# Altium PCB GPSBoard_L30.PcbDoc
Units mm, origin at the board's own origin, x right, y up, seen from the top; angles counter-clockwise.
Board outline 44 x 44 mm, 2 copper layers (Top Layer, Bottom Layer), stack 1.571 mm thick; 29 components, 18 nets, 142 pads, 30 vias.
Unrouted connection lines stored in the file: 12.
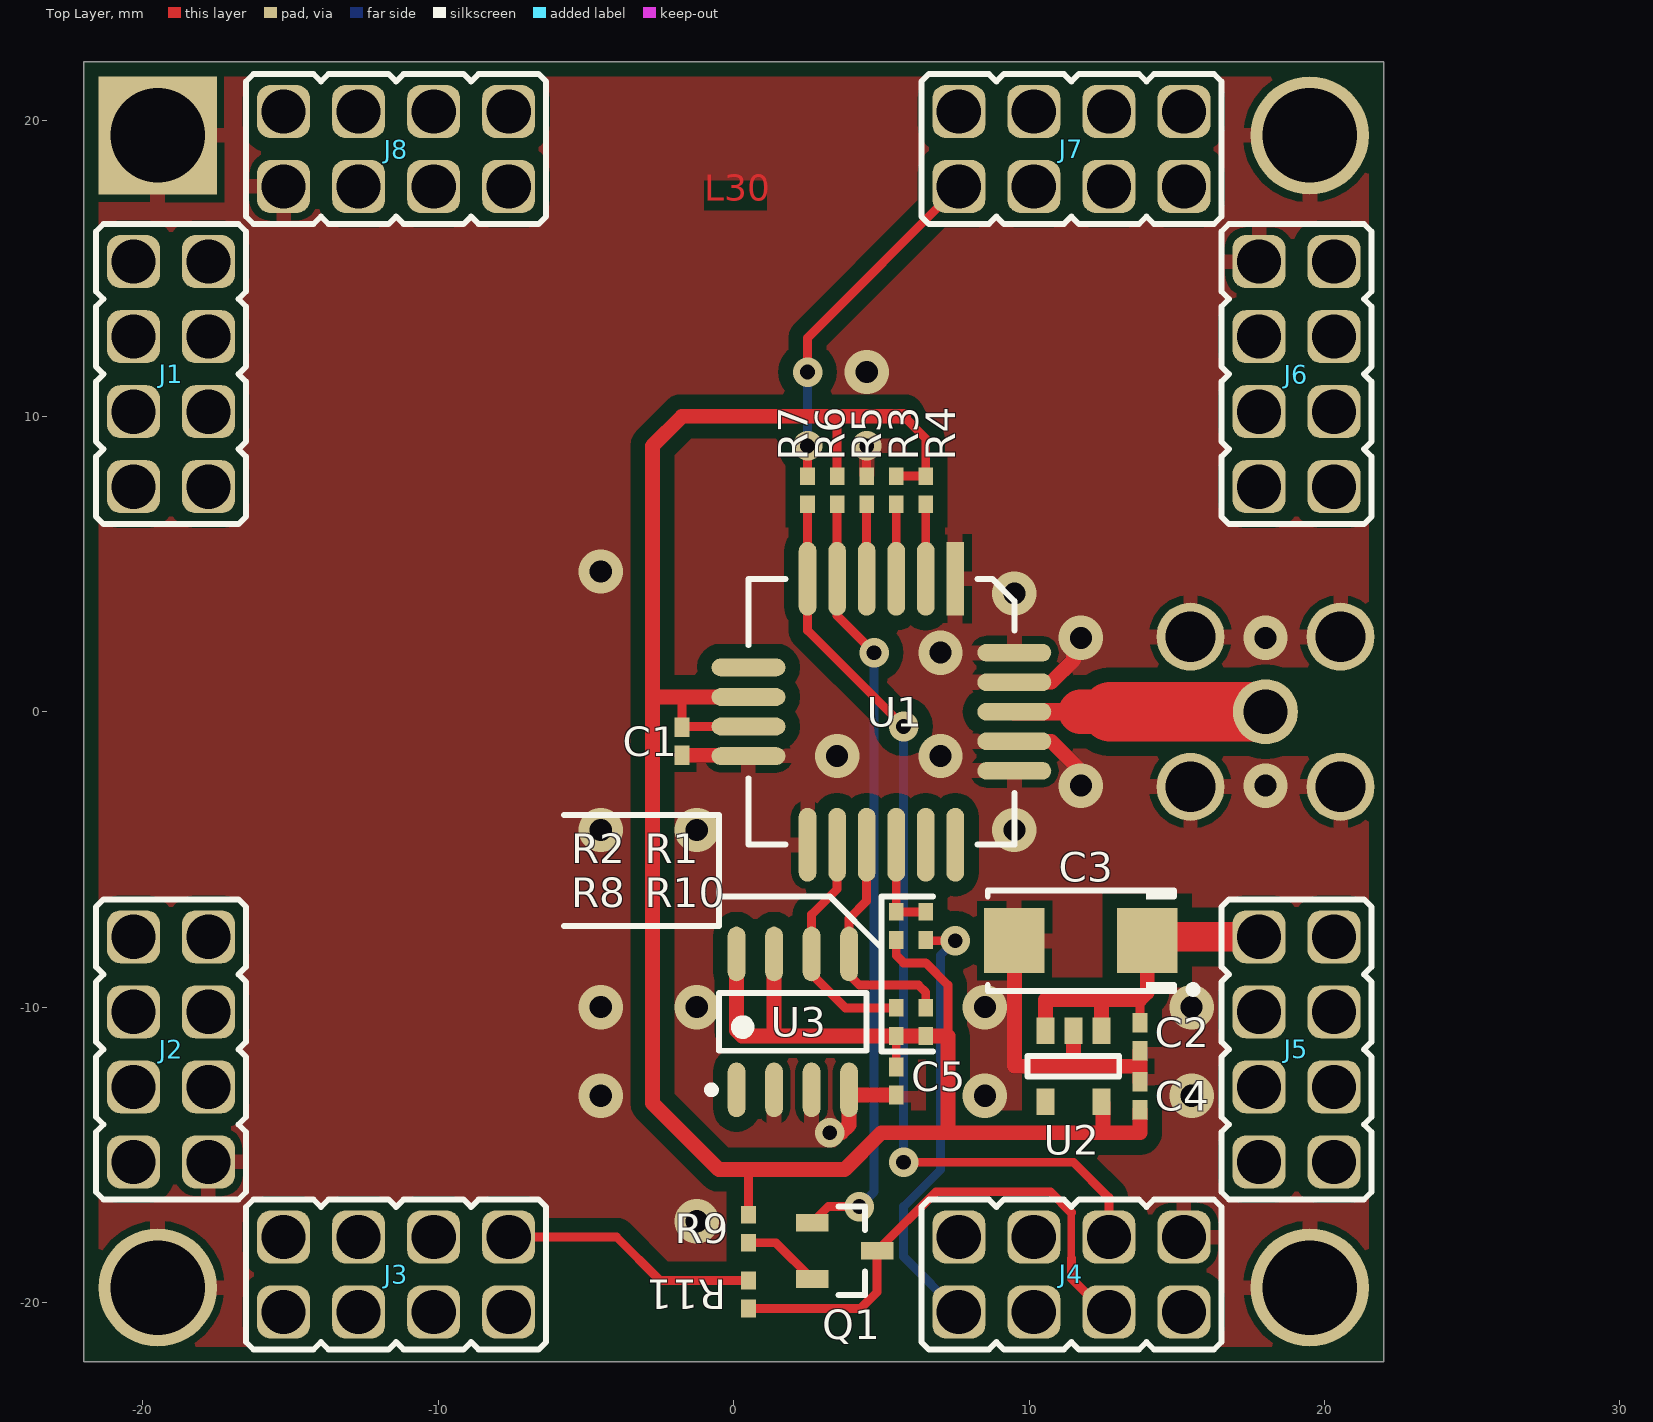
[diagram p0: Top Layer view]
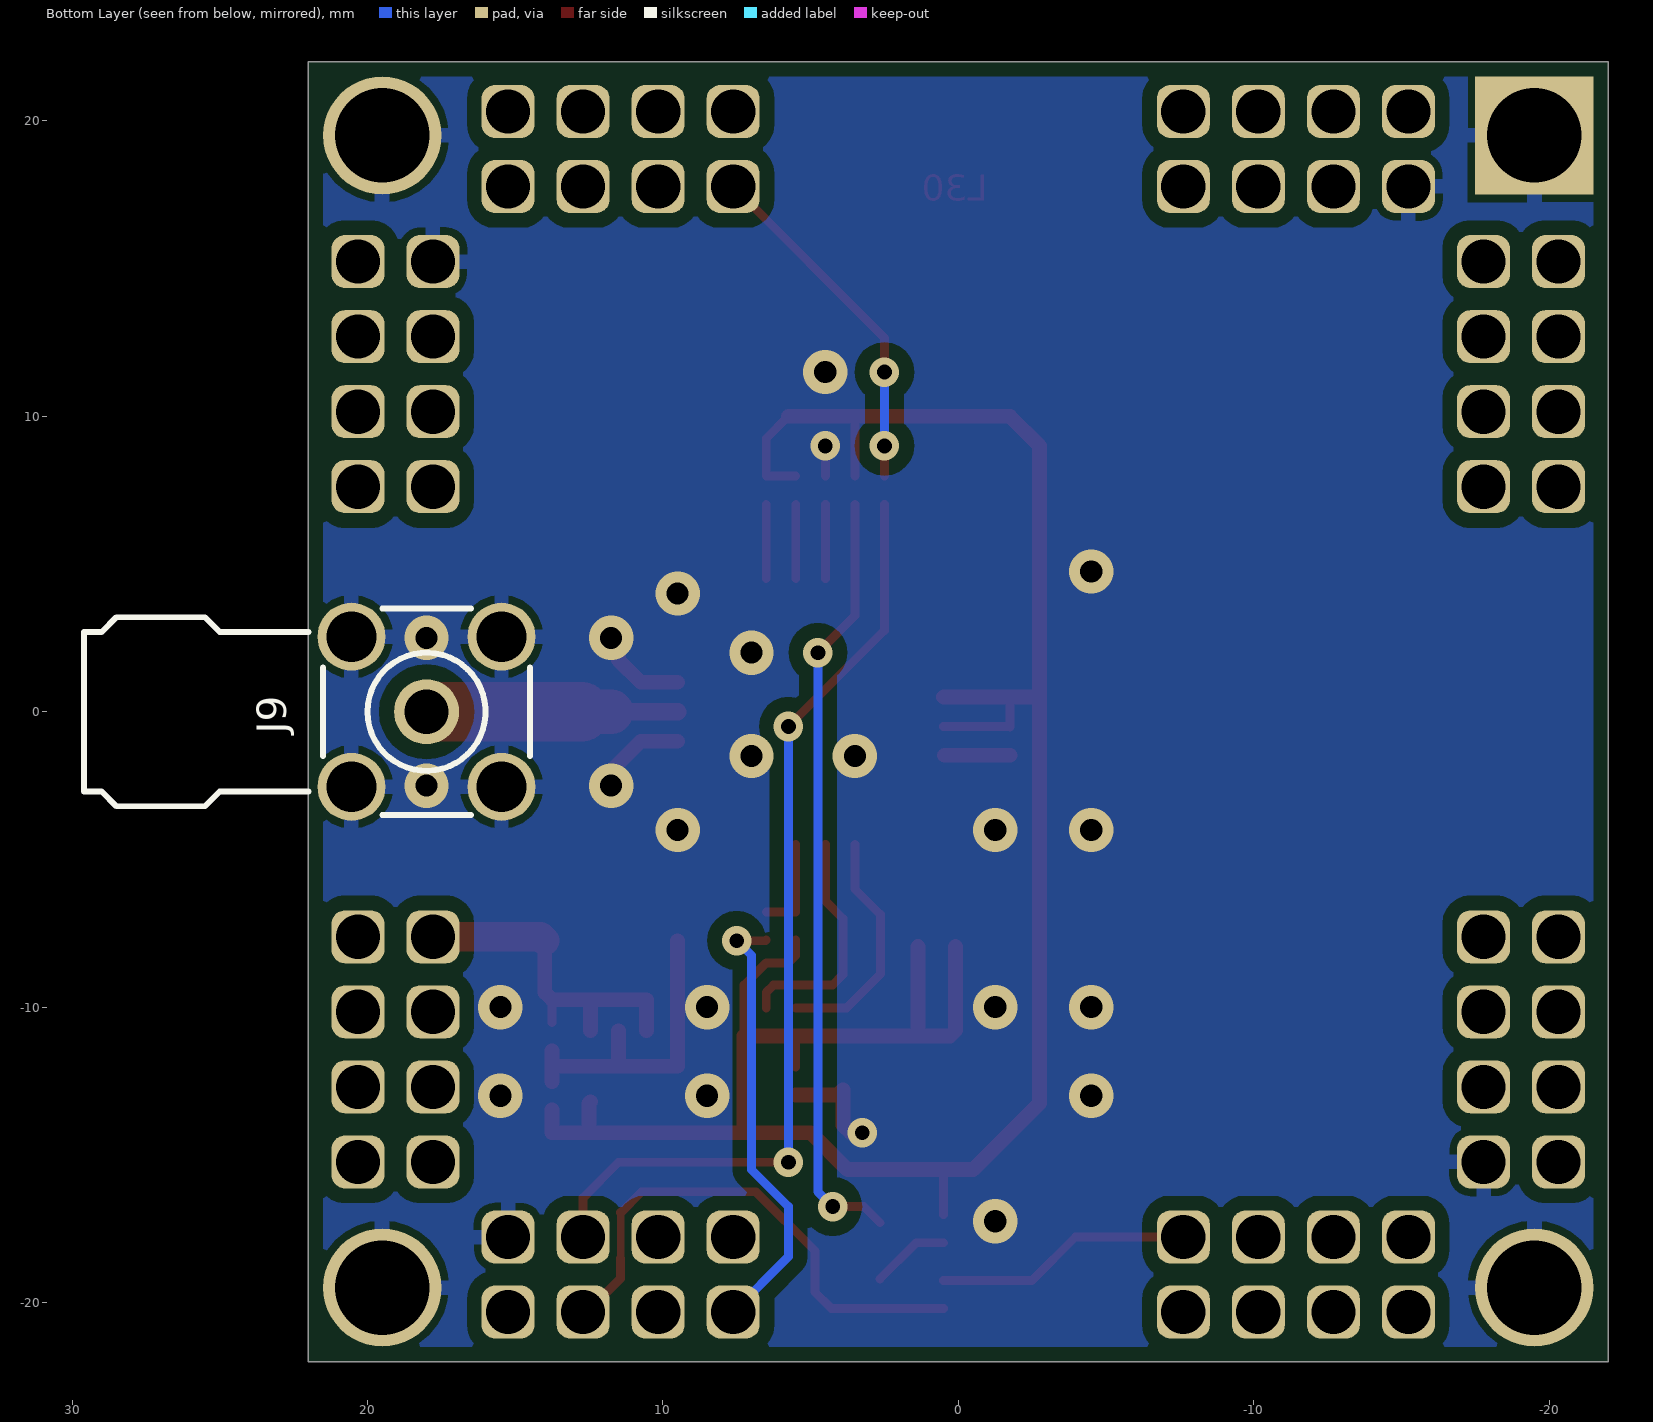
[diagram p1: Bottom Layer view, seen from below]

## Layer stack, top to bottom
Top Solder: solder mask 0.0102, Solder Resist, Dk 3.5
Top Layer: signal copper 0.0356
Dielectric 1: dielectric 1.5, FR-4, Dk 4.8
Bottom Layer: signal copper 0.0356
Bottom Solder: solder mask 0.0102, Solder Resist, Dk 3.5

## Board outline
-22,-22 -22,22 22,22 22,-22

## Design rules (kind name [scope] priority, off if disabled: settings)
Clearance Clearance_Text_Polygon(GND) [InPolygon and InNet('GND') vs IsText] p1: gap=0
Clearance Clearance_Track(GND)_Polygon(GND) [InPolygon and InNet('GND') vs IsTrack and InNet('GND')] p2: gap=0
Clearance Clearance_All_Polygon(GND) [InPolygon and InNet('GND')] p3: gap=0.5
Clearance [All] p4: gap=0.25
HoleSize [All] p1: absolutevalues=TRUE maxlimit=4 minlimit=0.3 maxpercent=80.000 minpercent=20.000
PolygonConnect PolygonConnect_Via(GND) [InNet('GND') vs IsVia] p1: connectstyle=Direct reliefconductorwidth=0.254 reliefentries=4 polygonreliefangle="90 Angle" airgapwidth=0.254
PolygonConnect [All] p2: connectstyle=Relief reliefconductorwidth=0.5 reliefentries=4 polygonreliefangle="90 Angle" airgapwidth=0.254
RoutingVias [All] p1: holewidth=0.5 width=1 viastyle="Through Hole" minholewidth=0.5 minwidth=1 maxholewidth=1.5 maxwidth=2
ShortCircuit ShortCircuit_Text_Polygon(GND) [IsText vs InPolygon and InNet('GND')] p1: allowed=TRUE
ShortCircuit [All] p2: allowed=FALSE
SolderMaskExpansion [All] p1: expansion=0.102
Width [All] p1: maxlimit=2 minlimit=0.25 preferedwidth=0.3
27 further rules are at their usual default settings.

## Components (designator, comment, footprint, x,y, rotation, side; value= is the part's Value field where it differs from the comment)
C1 "0.1/25" CAP0402 -1.75,-1 r90 top
C2 "0.1/25" CAP0402 13.75,-11 r90 top
C3 "220.0/6.3" SMC 11.75,-7.75 r180 top
C4 "0.1/25" CAP0402 13.75,-13 r270 top
C5 "0.1/25" CAP0402 5.5,-12.5 r90 top
J1 "LEFT" PBDM-8 -19.05,11.43 r270 top
J2 "LEFT" PBDM-8 -19.05,-11.43 r270 top
J3 "BOTTOM" PBDM-8 -11.43,-19.05 r0 top
J4 "BOTTOM" PBDM-8 11.43,-19.05 r0 top
J5 "RIGHT" PBDM-8 19.05,-11.43 r90 top
J6 "RIGHT" PBDM-8 19.05,11.43 r90 top
J7 "TOP" PBDM-8 11.43,19.05 r180 top
J8 "TOP" PBDM-8 -11.43,19.05 r180 top
J9 "SMA-F/A" SMA-F/A 18,0 r90 bottom
Q1 "BC846" SOT23 3.75,-18.25 r0 top
R1 "1k" RES0402 6.5,-7.25 r90 top
R2 "10k" RES0402 5.5,-7.25 r90 top
R3 "NC(10k)" RES0402 5.5,7.5 r270 top
R4 "10k" RES0402 6.5,7.5 r270 top
R5 "10k" RES0402 4.5,7.5 r270 top
R6 "10k" RES0402 3.5,7.5 r270 top
R7 "2k" RES0402 2.5,7.5 r270 top
R8 "10k" RES0402 5.5,-10.5 r270 top
R9 "1k" RES0402 0.5,-17.5 r270 top
R10 "10k" RES0402 6.5,-10.5 r270 top
R11 "2k" RES0402 0.5,-19.725 r270 top
U1 "L30" Quectel_L30 5,0 r270 top
U2 "LP2985-1.8" SOT23-5 11.5,-12 r270 top
U3 "M24M01" SO8 2,-10.5 r90 top

## Footprints (in the part's own frame and the unit in brackets; to place one, negate y for a bottom-side part, rotate by r counter-clockwise, add the part's x,y. Pads: shape width x height; smd on the part's side, far side on the other; paste and mask are expansions set on the pad)
CAP0402 [mm]
  rect 0.65x0.5 smd: 1(-0.475,0) 2(0.475,0)
  body extent -0.55,-0.3 0.55,0.3, height 0.5
PBDM-8 [mm] "5-pin interboard connector, pitch 2.54 mm"
  rrect50% 1.79x1.79 hole 1.5: 1(-3.81,-1.27) 2(-3.81,1.27) 3(-1.27,-1.27) 4(-1.27,1.27) 5(1.27,-1.27) 6(1.27,1.27) 7(3.81,-1.27) 8(3.81,1.27)
  silkscreen extent -5.08,-2.54 5.08,2.54, body extent -5.08,-2.54 5.08,2.54, height 3
Quectel_L30 [mm]
  rect 2.5x0.6 smd: 1(-4.5,2.5)
  oval 2.5x0.6 smd: 2(-4.5,1.5) 3(-4.5,0.5) 4(-4.5,-0.5) 5(-4.5,-1.5) 6(-4.5,-2.5) 11(4.5,-2.5) 12(4.5,-1.5) 13(4.5,-0.5) 14(4.5,0.5) 15(4.5,1.5) 16(4.5,2.5)
  oval 0.6x2.5 smd: 7(-1.5,-4.5) 8(-0.5,-4.5) 9(0.5,-4.5) 10(1.5,-4.5) 17(2,4.5) 18(1,4.5) 19(0,4.5) 20(-1,4.5) 21(-2,4.5)
  silkscreen extent -4.5,-4.5 4.5,4.5
RES0402 [mm]
  rect 0.6x0.5 smd: 1(-0.475,0) 2(0.475,0)
  body extent -0.53,-0.28 0.53,0.28, height 0.35
SMA-F/A [mm] "Angle SMA female connector"
  round 2.2 hole 1.5: 1(0,0)
  round 2.3 hole 1.7: 2(-2.54,-2.54) 2(-2.54,2.54) 2(2.54,-2.54) 2(2.54,2.54)
  silkscreen extent -3.5,-3.5 3.5,11.6, body extent -3.5,-3.5 3.5,11.6, height 10
SMC [mm] "Surface mount package, size C"
  rect 2.05x2.2 smd: 1(2.25,0) 2(-2.25,0)
  silkscreen extent -3.93,-1.7 3.15,1.77, body extent -3,-1.6 3,1.6, height 2.8
SO8 [mm] "SOIC, 8-Leads, Body 4,90x3,90mm, Pitch 1,27mm, IPC High Density"
  oval 1.85x0.6 smd: 1(-2.3,1.905) 2(-2.3,0.635) 3(-2.3,-0.635) 4(-2.3,-1.905) 5(2.3,-1.905) 6(2.3,-0.635) 7(2.3,0.635) 8(2.3,1.905)
  silkscreen extent -2.42,-2.5 0.97,2.88, body extent -3,-2.54 3,2.54, height 1.7
SOT23 [mm]
  rect 1.1x0.6 smd: 1(-1.1,0.95) 2(-1.1,-0.95) 3(1.1,0)
  silkscreen extent -0.2,-1.5 0.7,1.5, body extent -1.15,-1.5 1.15,1.5, height 1.1
SOT23-5 [mm] "SOT23, 5-Leads, Body 2,90x2,70mm, Pitch 0,95mm, IPC High Density"
  rect 0.9x0.6 smd: 1(-1.2,0.95) 2(-1.2,0) 3(-1.2,-0.95) 4(1.2,-0.95) 5(1.2,0.95)
  silkscreen extent -0.35,-1.55 0.35,1.55, body extent -1.43,-1.5 1.41,1.5, height 1.1

## Part data
C1 C2 C4 C5: library part CAP0402, "Ceramic chip capacitor 0402"
C3: library part TAJC, "Standard tantalum SMT capacitor, size C"
J1 J2 J3 J4 J5 J6 J7 J8: library part PBDM-8, "2x4-pin header, pitch 2.54 mm"
J9: "Angle SMA female connector"
Q1: "NPN Silicon AF Transistor"
R1 R2 R3 R4 R5 R6 R7 R8 R9 R10 R11: library part RES0402, "Ceramic chip resistor"
U1: "GPS Engine"
U2: "150-mA Low-Noise Low-Dropout Regulator with Shutdown"
U3: "1-Mbit serial I?C bus EEPROM"

## Free pads (board coordinates)
  round 4 hole 3.2: 0(-19.5,-19.491) 0(19.5,-19.491) 0(19.5,19.509)
  rect 4x4 hole 3.2: 0(-19.5,19.509)

## Via types
v1: diameter 1.5, hole 0.75, Top Layer to Bottom Layer, 21 vias
v2: diameter 1, hole 0.5, Top Layer to Bottom Layer, 9 vias

## Nets (pads, with @x,y where several pads share a name; then routed paths per layer and width w, separated by ;. In a path a pad name is that pad's centre, name@x,y a point inside that pad or via, vN(x,y) a via of type N, cw(c..) or ccw(c..) an arc to the next point about the centre after c; other vN are vias at no path point)
+1.8V: C1.2 C4.2 C5.2 R2.1 R3.1 R4.1 R6.1 R8.2 R9.1 R10.2 U1.8 U1.9 U2.5 U3.7 U3.8 | length 86.2
  Top Layer w0.3: -1.75,0.5 C1.2 -1.725,-0.5 U1.9 ; R9.1 0.5,-15.5 ; R6.1 3.5,10 ; C5.2 R8.2 ; R2.1 5.5,-8.25 5.75,-8.5 6.5,-8.5 7.25,-9.25 7.25,-10.975 ; R3.1 R4.1 6.5,9.25 5.75,10
  Top Layer w0.5: U3.8@0.095,-7.95 0.095,-10.795 0.275,-10.975 1.365,-10.975 ; U1.8 -1.75,0.5 -2.75,0.5 ; U3.7@1.365,-7.95 1.365,-10.975 ; 5.75,10 3.5,10 -1.75,10 -2.75,9 -2.75,0.5 ; U2.5 12.5,-13.25 12.5,-14.25 ; C4.2 13.75,-14.25 12.5,-14.25 ; -2.75,0.5 -2.75,-13.25 -0.5,-15.5 0.5,-15.5 3.75,-15.5 5,-14.25 7.25,-14.25 ; 1.365,-10.975 R8.2 R10.2 7.25,-10.975 7.25,-14.25 ; 7.25,-14.25 12.5,-14.25
+5V: J1.6 J3.6 J5.6 J7.6
+12V: J1.2 J3.2 J5.2 J7.2
ANT: J9.1 U1.19 | length 8.5
  Top Layer w0.6: U1.19 11.75,0
  Top Layer w1.5: 11.75,0 12.75,0
  Top Layer w2: 12.75,0 J9.1
GND: C1.1 C2.1 C3.1 C4.1 C5.1 J2.8 J4.8 J6.8 J8.8 J9.2 pad.0 R5.1 U1.1 U1.10 U1.11 U1.17 U1.18 U1.20 U1.21 U2.2 U3.2 U3.3 U3.4 | length 23.9
  Top Layer w0.3: R5.1 v2(4.5,9)
  Top Layer w0.5: C1.1 U1.10@0.475,-1.475 ; v2(3.25,-14.25) 3.645,-14.25 3.905,-13.99 U3.4 4.08,-12.975 C5.1 ; C3.1 9.5,-12 11.5,-12 ; U1.18 10.75,-1 11.75,-2 v1(11.75,-2.5) ; U1.20 10.75,1 11.5,1.75 11.5,2.25 v1(11.75,2.5) ; U2.2 11.5,-12 ; C4.1 13.75,-12 ; C2.1 13.75,-12 ; 11.5,-12 13.75,-12
  other v1: -1.25,-17.25 -4.5,-13 8.5,-13 15.5,-13 -4.5,-10 -1.25,-10 8.5,-10 15.5,-10 -4.5,-4 -1.25,-4 9.5,-4 18,-2.5 3.5,-1.5 7,-1.5 7,2 18,2.5 9.5,4 -4.5,4.75 4.5,11.5
GPS_ON/O\F\F\: J4.1 R1.1 | length 15.1
  Top Layer w0.3: R1.1 6.525,-7.75 v2(7.5,-7.75)
  Bottom Layer w0.3: v2(7.5,-7.75) 7,-8.25 7,-15.5 5.75,-16.75 5.75,-18.45 J4.1
GPS_RXD/SCL: J4.5 Q1.3 R11.2 | length 17.6
  Top Layer w0.25: 11.43,-18.5 11.43,-16.956
  Top Layer w0.3: R11.2 4.3,-20.2 4.85,-19.65 Q1.3 6.85,-16.25 10.724,-16.25 11.43,-16.956 ; 11.43,-18.5 11.43,-19.18 12.57,-20.32 J4.5
GPS_TXD/SDA: J4.6 R7.2 U1.6 | length 32.4
  Top Layer w0.3: R7.2 U1.6 2.5,2.75 v2(5.75,-0.5) ; v2(5.75,-15.25) 11.5,-15.25 12.7,-16.45 J4.6
  Bottom Layer w0.3: v2(5.75,-15.25) v2(5.75,-0.5)
NetQ1_1: Q1.1 R6.2 U1.5 | length 26.3
  Top Layer w0.3: Q1.1 3.2,-16.75 v2(4.25,-16.75) ; R6.2 U1.5 3.5,3.25 v2(4.75,2)
  Bottom Layer w0.3: v2(4.25,-16.75) 4.75,-16.25 v2(4.75,2)
NetQ1_2: Q1.2 R9.2 | length 2.7
  Top Layer w0.3: R9.2 1.425,-17.975 Q1.2
NetR1_2: R1.2 R2.2 U1.14 | length 3.3
  Top Layer w0.3: U1.14 R2.2 R1.2
NetR3_2: R3.2 U1.3 | length 2.5
  Top Layer w0.3: U1.3 R3.2
NetR4_2: R4.2 U1.2 | length 2.5
  Top Layer w0.3: U1.2 R4.2
NetR5_2: R5.2 U1.4 | length 2.5
  Top Layer w0.3: U1.4 R5.2
NetR8_1: R8.1 U1.12 U3.6 | length 8.1
  Top Layer w0.3: U1.12 3.5,-6 2.635,-6.865 U3.6 2.635,-8.885 3.775,-10.025 R8.1
NetR10_1: R10.1 U1.13 U3.5 | length 8
  Top Layer w0.3: U1.13 4.5,-6.405 3.905,-7 U3.5 3.905,-8.905 4.25,-9.25 6.25,-9.25 6.5,-9.5 R10.1
VBAT: J1.4 J3.4 J5.4 J7.4
VCC: C2.2 C3.2 J1.8 J3.8 J5.8 J7.8 R7.1 R11.1 U2.1 U2.3 | length 32.7
  Top Layer w0.3: J3.8 -3.97,-17.78 -2.5,-19.25 R11.1 ; R7.1 v2(2.5,9) ; v2(2.5,11.5) 2.5,12.66 J7.8 ; C2.2 13.75,-9.75
  Top Layer w0.5: U2.3 10.55,-9.75 12.45,-9.75 ; U2.1 12.45,-9.75 ; C3.2 14,-9.5 13.75,-9.75 12.45,-9.75
  Top Layer w1: C3.2 14.13,-7.62 J5.8
  Bottom Layer w0.3: v2(2.5,9) v2(2.5,11.5)
pads on no net: J1.1 J1.3 J1.5 J1.7 J2.1 J2.2 J2.3 J2.4 J2.5 J2.6 J2.7 J3.1 J3.3 J3.5 J3.7 J4.2 J4.3 J4.4 J4.7 J5.1 J5.3 J5.5 J5.7 J6.1 J6.2 J6.3 J6.4 J6.5 J6.6 J6.7 J7.1 J7.3 J7.5 J7.7 J8.1 J8.2 J8.3 J8.4 J8.5 J8.6 J8.7 U1.7 U1.15 U1.16 U2.4 U3.1

## Polygon pours and split planes (outlines as drawn)
GND on Top Layer "Top-GND" (solid, remove dead copper, pour order 3): -21.5,-21.5 21.5,-21.5 21.5,21.5 -21.5,21.5
GND on Bottom Layer "Bottom-GND" (solid, remove dead copper, pour order 4): -21.5,-21.5 21.5,-21.5 21.5,21.5 -21.5,21.5

## Other copper
Top Layer:
  pour cut-out: 21.75,-1.5 18,-1.5 18,1.5 21.75,1.5
  text "L30" at -1,17 h1.52

## Silkscreen, mask and mechanical layers (free items; w line width, h text height)
Top Overlay:
  lines w0.2: -5.75,-7.25 -0.5,-7.25 -0.5,-3.5 -5.75,-3.5 ; -0.5,-6.25 3.25,-6.25 5,-8 ; 6.75,-11.5 5,-11.5 5,-8 ; 6.75,-6.25 5,-6.25 5,-8
Board:
  the board outline again, w0.2